# EAGLE board SONAR_PCB (EAGLE 9.6.2)
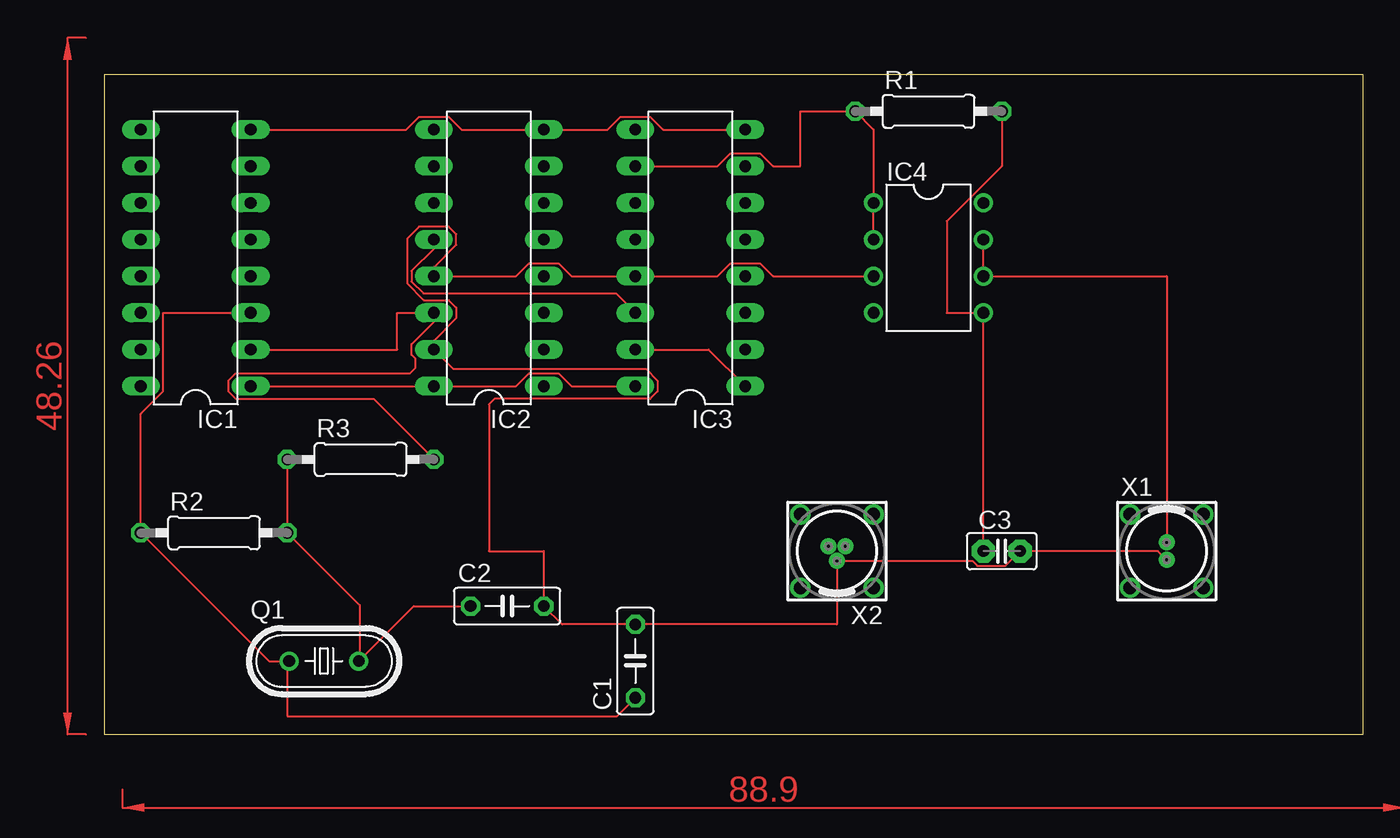
[diagram p0: board, top side]

Size 87.3 x 45.71 mm. Coordinates in mm from the lower left corner, seen from the top.
Outline: 0,0 87.3,0 87.3,45.71 0,45.71 0,0
Copper layers (1*16): Top 0.035mm / dielectric 1.5mm / Bottom 0.035mm
Design rules "default": minimum track width 6mil, minimum drill 0.35mm, track to track 6mil, track to pad 6mil, pad to pad 6mil, via to via 6mil, smd to smd 6mil, copper to edge 40mil, drill to drill 6mil, minimum pad ring 10mil, minimum via ring 8mil, stop-mask expansion 4mil, vias tented up to drill 0mil, thermal gap 10mil

## Footprints (pad centres in the part's own frame; a part is rotated, then mirrored left to right if it is on the bottom)
C050-025X075 = drill 0.813 octagon: 1 -2.54,0; 2 2.54,0
C2.5-2 = drill 0.813 pad 1.6 octagon: 1 -1.27,0; 2 1.27,0
DIL16 = drill 0.813 long: 1 -8.89,-3.81; 2 -6.35,-3.81; 3 -3.81,-3.81; 4 -1.27,-3.81; 5 1.27,-3.81; 6 3.81,-3.81; 7 6.35,-3.81; 8 8.89,-3.81; 9 8.89,3.81; 10 6.35,3.81; 11 3.81,3.81; 12 1.27,3.81; 13 -1.27,3.81; 14 -3.81,3.81; 15 -6.35,3.81; 16 -8.89,3.81
DIL08 = drill 0.813 pad 1.27: 1 -3.81,-3.81; 2 -1.27,-3.81; 3 1.27,-3.81; 4 3.81,-3.81; 5 3.81,3.81; 6 1.27,3.81; 7 -1.27,3.81; 8 -3.81,3.81
HC49U-V = drill 0.813: 1 -2.413,0; 2 2.413,0
0207/10 = drill 0.813 octagon: 1 -5.08,0; 2 5.08,0
EZG-00-302 = drill 0.6 pad 1: 1 0,0.6; 2 0,-0.6 | drill 0.9 pad 1.2: M1 -2.54,2.54; M2 2.54,2.54; M3 2.54,-2.54; M4 -2.54,-2.54
EZG-00-303 = drill 0.6 pad 1: 1 0,0.675; 2 -0.585,-0.338; 3 0.585,-0.338 | drill 0.9 pad 1.2: M1 -2.54,2.54; M2 2.54,2.54; M3 2.54,-2.54; M4 -2.54,-2.54

## Placement (x,y rotation side)
C1  [C050-025X075]  36.83,5.08 90 top
C2  [C050-025X075]  27.94,8.89 0 top
C3  [C2.5-2]  62.23,12.7 0 top
IC1  4049N  [DIL16]  6.35,33.02 90 top
IC2  4017N  [DIL16]  26.67,33.02 90 top
IC3  4017N  [DIL16]  40.64,33.02 90 top
IC4  TL072P  [DIL08]  57.15,33.02 270 top
Q1  [HC49U-V]  15.24,5.08 0 top
R1  [0207/10]  57.15,43.18 0 top
R2  [0207/10]  7.62,13.97 0 top
R3  [0207/10]  17.78,19.05 0 top
X1  EZG-00-302  [EZG-00-302]  73.66,12.7 0 top
X2  EZG-00-303  [EZG-00-303]  50.8,12.7 180 top

## Library data of the parts
C1 C2 = rcl; SPICEPREFIX: C
C3 = capacitor-wima
IC1-IC3 = 40xx
IC4 = linear
Q1 = crystal; OC_FARNELL: 1666969; OC_NEWARK: unknown
R1-R3 = rcl; SPICEPREFIX: R
X1 X2 = con-lemo; OC_FARNELL: unknown; OC_NEWARK: unknown

## Nets
N$1: C1.1 IC1.3 Q1.1 R2.1
N$2: IC1.2 IC2.14 R3.2
N$3: IC2.12 IC3.14
N$4: IC3.10 IC4.1 IC4.2 R1.1
N$5: IC3.1 IC3.15
N$6: C3.1 IC4.5 R1.2
N$7: IC4.6 IC4.7 X1.1
N$8: C1.2 C2.2 C3.2 IC2.13 IC2.15 IC3.13 IC4.3 X1.2 X2.1
N$9: C2.1 Q1.2 R2.2 R3.1
V+: IC4.8
V-: IC4.4
VDD: IC1.1 IC2.16 IC3.16
VSS: IC1.8 IC2.8 IC3.8

## Tracks (layer width: path | path; a pad name or v marks a point on that pad's centre or on a via)
N$1
  Top 0.152: IC1.3 4.09,29.21 4.09,23.76 2.54,22.21 R2.1 11.43,5.08 Q1.1 12.7,4.95 12.7,1.27 35.56,1.27 C1.1
N$2
  Top 0.152: IC1.2 20.32,26.67 20.32,29.21 IC2.14 22.86,28.59 21.31,27.04 21.31,26.3 21.59,26.02 21.59,25.4 21.21,25.02 9.13,25.02 8.61,24.5 8.61,23.76 9.13,23.24 18.67,23.24 R3.2
N$3
  Top 0.152: IC3.14 35.48,30.56 22.14,30.56 21.31,31.38 21.31,32.12 22.86,33.67 IC2.12
N$4
  Top 0.152: IC3.10 42.53,39.37 43.42,40.26 45.48,40.26 46.37,39.37 48.26,39.37 48.26,43.18 R1.1 53.34,41.91 IC4.1 IC4.2
N$5
  Top 0.152: IC3.15 41.91,26.67 IC3.1
N$6
  Top 0.152: R1.2 62.23,39.37 58.42,35.56 58.42,29.21 IC4.5 C3.1
N$7
  Top 0.152: IC4.7 IC4.6 73.66,31.75 X1.1
N$8
  Top 0.152: X1.2 73.06,12.7 C3.2 62.47,11.67 60.53,11.67 60.18,12.03 X2.1 50.8,7.62 C1.2 31.75,7.62 C2.2 30.48,12.7 26.67,12.7 26.67,22.86 27.05,23.24 37.86,23.24 38.38,23.76 38.38,24.5 37.55,25.32 24.21,25.32 IC2.15 22.86,27.29 24.41,28.84 24.41,29.58 23.89,30.1 22.16,30.1 21.01,31.26 21.01,34.35 21.83,35.18 23.89,35.18 24.41,34.66 24.41,33.92 22.86,32.37 IC2.13 28.56,31.75 29.45,32.64 31.51,32.64 32.4,31.75 IC3.13 42.53,31.75 43.42,32.64 45.48,32.64 46.37,31.75 IC4.3
N$9
  Top 0.152: Q1.2 17.72,5.14 | 17.72,5.14 21.46,8.89 C2.1 | R3.1 R2.2 17.72,8.95 17.72,5.14
VDD
  Top 0.152: IC1.1 IC2.16 28.56,24.13 29.45,25.02 31.51,25.02 32.4,24.13 IC3.16
VSS
  Top 0.152: IC1.8 20.94,41.91 21.83,42.8 23.89,42.8 24.78,41.91 IC2.8 34.91,41.91 35.8,42.8 37.86,42.8 38.75,41.91 IC3.8
(copper drawn outside any net)
  shapes: Top area x2